# Altium PCB 光电读码.pcbdoc
Units mm, origin at the board's own origin, x right, y up, seen from the top; angles counter-clockwise.
Board outline 22.23 x 31 mm, 2 copper layers (Top Layer, Bottom Layer); 13 components, 154 nets, 41 pads, 11 vias.
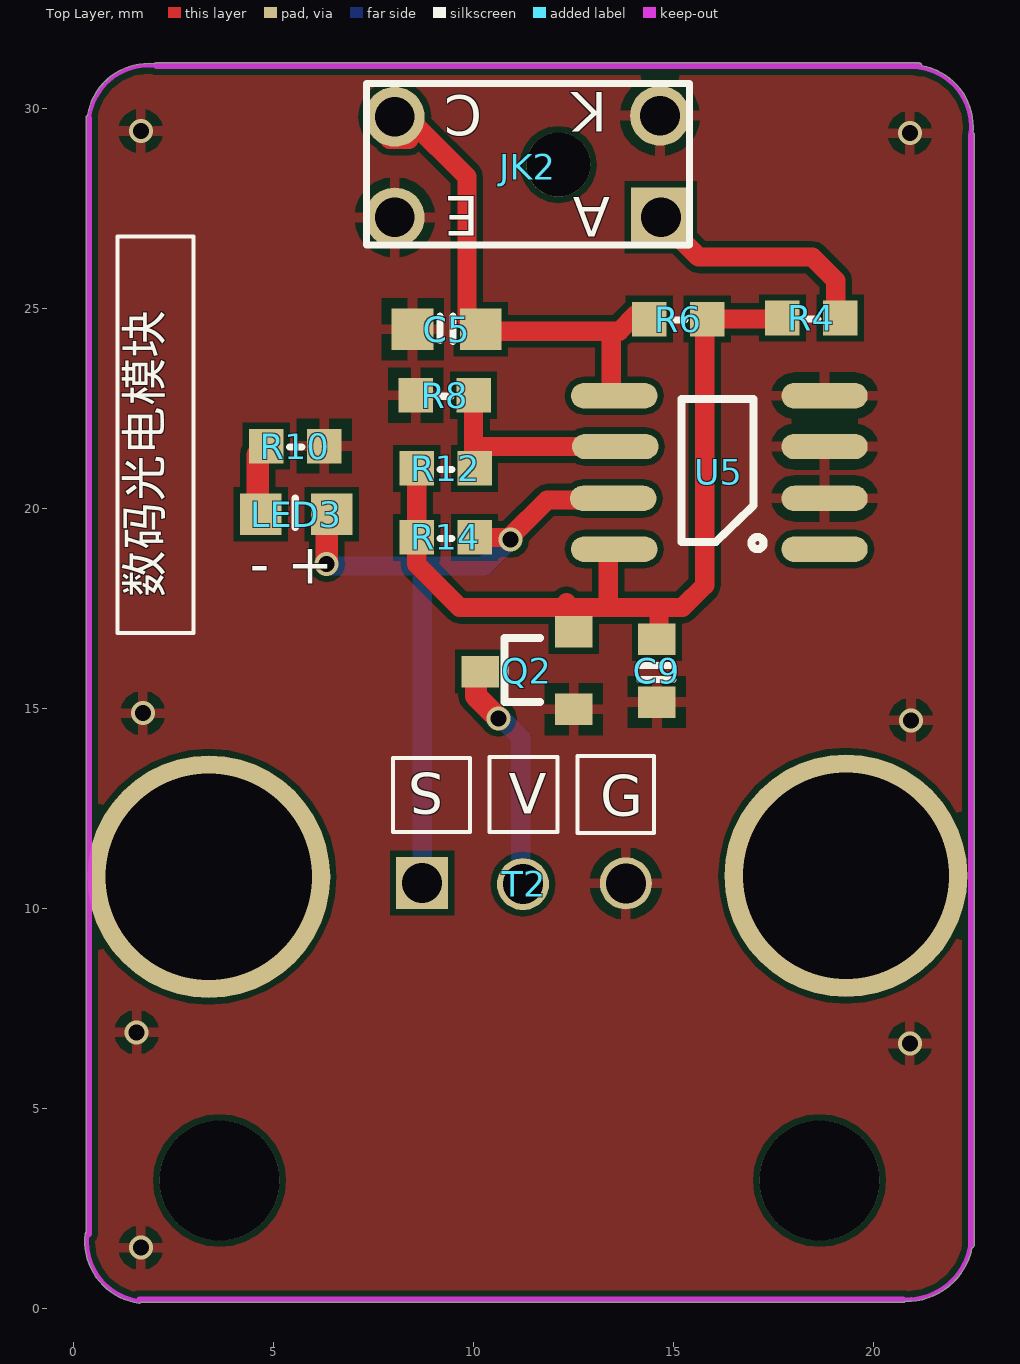
[diagram p0: Top Layer view]
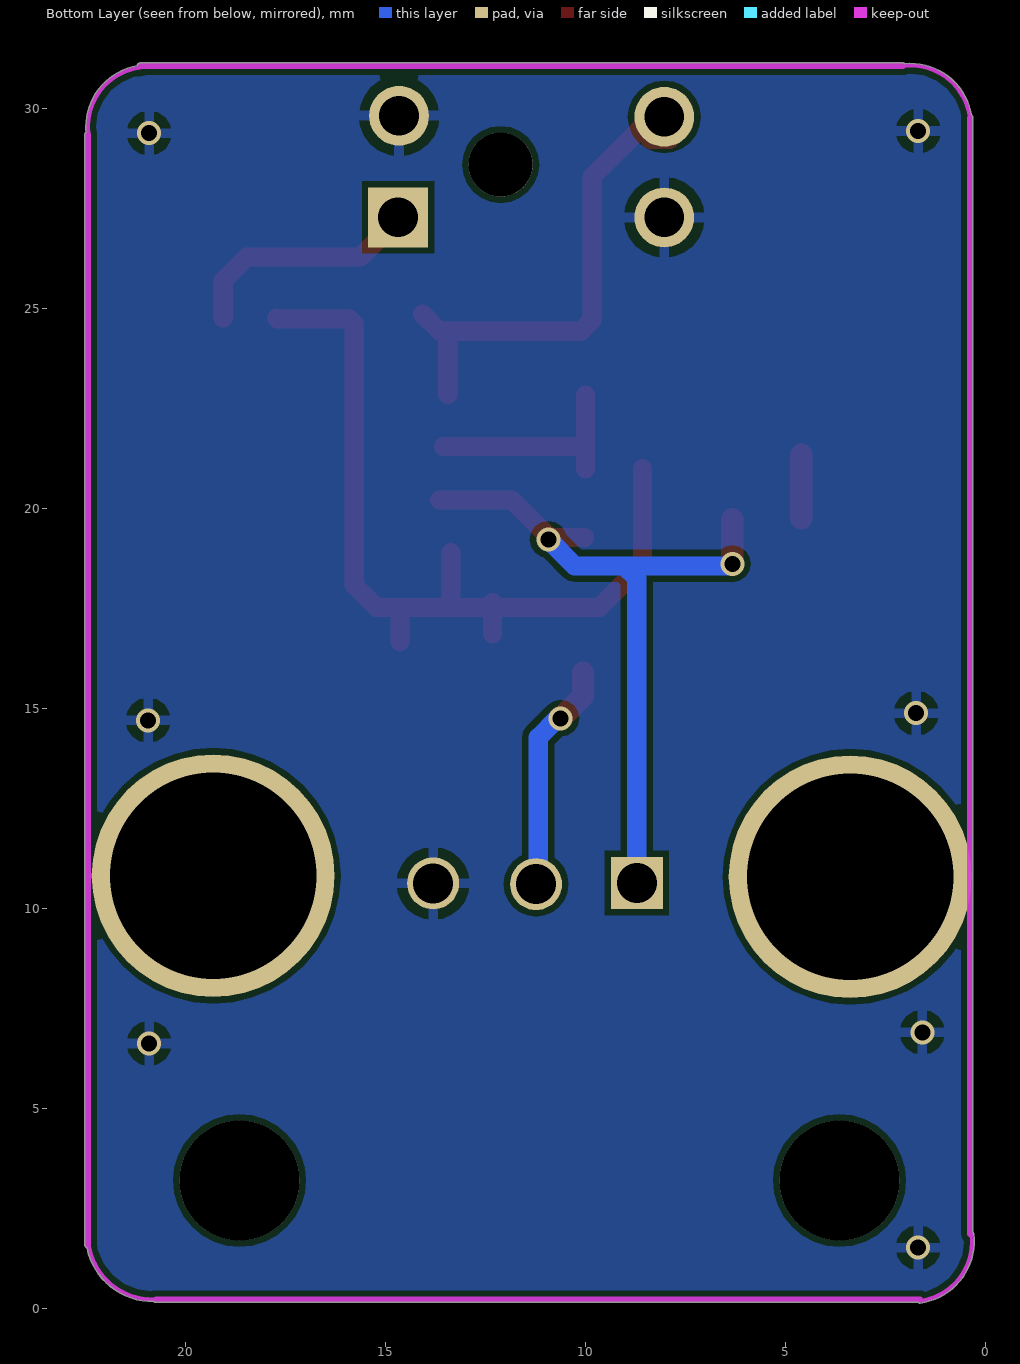
[diagram p1: Bottom Layer view, seen from below]

## Layer stack, top to bottom
Top Solder: solder mask 0.0102, Solder Resist, Dk 3.5
Top Layer: signal copper 0.0356
Dielectric 1: dielectric 0.32, FR-4, Dk 4.8
Bottom Layer: signal copper 0.0356
Bottom Solder: solder mask 0.0102, Solder Resist, Dk 3.5

## Board outline
0.291,1.882 ccw(c1.827,1.685) 1.63,0.148 ccw(c1.637,0.199) 1.675,0.165 20.731,0.165 ccw(c20.731,0.24) 20.784,0.187 ccw(c20.819,1.853) 22.454,1.527 ccw(c22.432,1.599) 22.508,1.599 22.508,29.361 ccw(c22.432,29.361) 22.477,29.421 ccw(c20.934,29.552) 22.483,29.552 ccw(c20.934,29.552) 21.2,31.078 ccw(c21.124,31.076) 21.124,31.151 2.062,31.151 ccw(c2.062,31.076) 2.012,31.132 ccw(c1.871,29.59) 0.343,29.842 ccw(c0.385,29.78) 0.31,29.78 0.31,1.915 ccw(c0.341,1.875)

## Design rules (kind name [scope] priority, off if disabled: settings)
Clearance [All] p1: gap=0.152 ignorepadtopadclearanceinfootprint=FALSE
HoleToHoleClearance [All] p1: gap=0.203 allowstackedmicrovias=TRUE
PolygonConnect [All] p1: connectstyle=Relief reliefconductorwidth=0.254 reliefentries=4 polygonreliefangle="90 Angle" airgapwidth=0.254
RoutingVias [All] p1: holewidth=6 width=8 viastyle="Through Hole" minholewidth=0.3 minwidth=0.6 maxholewidth=0.711 maxwidth=1.27
SilkToSilkClearance [All] p1: silktosilkclearance=0.152
SolderMaskExpansion [All] p1: expansion=0.102
Width [All] p1: maxlimit=5 minlimit=0.203 preferedwidth=0.254
28 further rules are at their usual default settings.

## Components (designator, comment, footprint, x,y, rotation, side; value= is the part's Value field where it differs from the comment)
C5 "104" COMPONENT_4 9.32,24.494 r180 top
C9 "105" COMPONENT_5 14.578,15.96 r0 top
JK2 "ITR20403红外线对射式光电开关" COMPONENT_1 11.352,28.558 r0 top
LED3 "LED蓝" COMPONENT_2 5.561,19.871 r0 top
Q2 "662K" COMPONENT_6 11.327,15.96 r0 top
R4 "100R" COMPONENT_3 18.439,24.773 r0 top
R6 "10K" COMPONENT_3 15.112,24.748 r0 top
R8 "10K" COMPONENT_3 9.27,22.843 r0 top
R10 "150R" COMPONENT_3 5.536,21.573 r0 top
R12 "10K" COMPONENT_3 9.295,21.014 r0 top
R14 "10K" COMPONENT_3 9.295,19.287 r0 top
T2 "弯针连接器KF2510-3P白色" 21 8.711,10.651 r270 top
U5 "LM358" COMPONENT_7 16.128,20.913 r0 top

## Footprints (in the part's own frame and the unit in brackets; to place one, negate y for a bottom-side part, rotate by r counter-clockwise, add the part's x,y. Pads: shape width x height; smd on the part's side, far side on the other; paste and mask are expansions set on the pad)
21 [mm]
  rect 1.3x1.3 hole 1: 1(0,0)
  round 1.3 hole 1: 2(0.031,2.519) 3(0.01,5.09)
COMPONENT_1 [mil]
  rect 58.84x58.84 hole 39: 1(131,-50)
  round 58.84 hole 39: 2(130,50) 3(-131,49) 4(-131,-50)
  round 63 hole 63: 5(30,2)
  silkscreen extent -159,-77 159,82
COMPONENT_2 [mil]
  rect 41x41 smd: 1(35,0) 2(-35,0)
  silkscreen extent -1,-13 -1,16
COMPONENT_3 [mil]
  rect 34x34 smd: 1(-28.5,0) 2(28.5,0)
  silkscreen extent -6,-1 6,-1
COMPONENT_4 [mil]
  rect 41x41 smd: 1(33.5,0) 2(-33.5,0)
  silkscreen extent -6,-13 7,12
COMPONENT_5 [mil]
  rect 37x31 smd: 1(0,31) 2(0,-31)
  silkscreen extent -18,-9 16,5
COMPONENT_6 [mil]
  rect 37x31 smd: 1(46,-38) 2(46,38) 3(-46,-1)
  silkscreen extent -22,-31 13,32
COMPONENT_7 [mil]
  oval 85x25 smd: 1(104,-75.5) 2(104,-25.5) 3(104,25.5) 4(104,75.5) 5(-103,75.5) 6(-102,25.5) 7(-104,-25.5) 8(-103,-75.5)
  silkscreen extent -37,-75 44,72

## Free pads (board coordinates)
  round 6.071 hole 5.156: 1(19.303,10.829) 2(3.377,10.803)
  round 3 hole 3 mask+0.102: 13(3.643,3.212) 14(18.643,3.212)

## Via types
v1: diameter 0.6, hole 0.4, Top Layer to Bottom Layer, tented both sides, 10 vias
v2: diameter 0.8, hole 0.4, Top Layer to Bottom Layer, 1 vias

## Nets (pads, with @x,y where several pads share a name; then routed paths per layer and width w, separated by ;. In a path a pad name is that pad's centre, name@x,y a point inside that pad or via, vN(x,y) a via of type N, cw(c..) or ccw(c..) an arc to the next point about the centre after c; other vN are vias at no path point)
3.3V: 
+5v: 
AOUT1: 
AOUT2: 
BOUT1: 
BOUT2: 
D+: 
D-: 
DTR: 
GND: C5.1 C9.2 JK2.2 JK2.4 Q2.1 R8.1 R10.2 T2.3 U5.2 U5.3 U5.4
  other v1: 1.675,1.532 20.903,6.638 1.573,6.917 20.928,14.715 1.726,14.893 20.903,29.396 1.675,29.447
M11: 
M12: 
M21: 
M22: 
Net: 
NewNet1: 
NewNet2: 
NewNet3: 
NewNet4: 
NewNet15: 
NewNet16: 
NewNet17: 
NewNet18: 
NewNet19: 
NewNet20: 
NewNet21: 
NewNet22: 
NewNet23: 
NewNet24: 
NewNet25: 
NewNet26: 
NewNet27: 
NewNet28: 
NewNet29: 
NewNet30: 
NewNet31: 
NewNet32: 
NewNet33: 
NewNet34: 
NewNet35: 
NewNet36: 
NewNet37: 
NewNet38: 
NewNet39: 
NewNet40: 
NewNet41: 
NewNet42: 
NewNet43: 
NewNet44: 
NewNet45: 
NewNet46: 
NewNet47: 
NewNet48: 
NewNet49: 
NewNet50: 
NewNet51: 
NewNet52: 
NewNet53: 
NewNet55: C5.2 JK2.3 R6.1 U5.5 | length 12
  Top Layer w0.481: JK2.3@7.898,29.244 JK2.3@8.381,29.244 ; JK2.3@8.381,29.752 9.828,28.304 9.828,24.723 10.108,24.443 13.638,24.443 R6.1@14.07,24.875 ; U5.5@13.435,22.868 13.435,24.265
NewNet56: JK2.1 R4.2 | length 6
  Top Layer w0.481: JK2.1 14.68,27.237 15.62,26.297 18.464,26.297 19.049,25.713 R4.2@19.049,24.773
NewNet57: Q2.3 T2.2 | length 5.7
  Top Layer w0.557: Q2.3@10.057,15.909 10.057,15.325 v1(10.616,14.766)
  Bottom Layer w0.481: v1@10.692,14.766 11.175,14.283 T2.2@11.175,10.674
NewNet58: LED3.1 R14.2 T2.1 U5.7 | length 18.1
  Top Layer w0.481: R14.2 10.895,19.287 11.835,20.227 U5.7@13.638,20.227
  Top Layer w0.557: v1(6.323,18.627) LED3.1@6.323,19.744
  Bottom Layer w0.481: v1(6.323,18.627) 6.374,18.576 9.016,18.576 ; T2.1 8.711,18.271 9.016,18.576 ; v1(10.921,19.236) 10.26,18.576 9.016,18.576
NewNet59: 
NewNet60: 
NewNet61: 
NewNet62: 
NewNet63: 
NewNet64: 
NewNet65: 
NewNet66: 
NewNet67: 
NewNet68: 
NewNet69: 
NewNet70: 
NewNet71: 
NewNet72: 
NewNet73: 
NewNet74: 
NewNet75: 
NewNet76: 
NewNet77: 
NewNet78: 
NewNet79: 
NewNet80: 
NewNet81: 
NewNet82: 
NewNet83: 
NewNet84: 
NewNet85: 
NewNet86: 
NewNet87: 
NewNet88: 
NewNet89: 
NewNet90: 
NewNet91: 
NewNet92: 
NewNet93: 
NewNet94: 
NewNet95: 
NewNet96: 
NewNet97: 
NewNet100: 
NewNet102: 
NewNet104: 
NewNet105: 
NewNet107: 
NewNet112: 
NewNet113: 
NewNet115: 
NewNet116: 
NewNet117: 
NewNet118: 
NewNet119: 
NewNet120: 
NewNet121: 
NewNet122: 
NewNet123: 
NewNet124: 
NewNet125: 
NewNet126: C9.1 Q2.2 R4.1 R6.2 R12.1 R14.1 U5.8 | length 21.5
  Top Layer w0.481: R12.1 8.571,18.614 9.651,17.534 15.213,17.534 15.772,18.093 15.772,24.621 15.899,24.748 17.69,24.748 R4.1 ; Q2.2@12.318,16.874 12.318,17.661 ; 13.359,17.661 U5.8@13.359,18.906 ; C9.1@14.629,16.671 14.629,17.357
NewNet127: R8.2 R12.2 U5.6 | length 5.2
  Top Layer w0.481: R12.2@9.993,21.002 R8.2 ; 10.222,21.56 U5.6
NewNet128: LED3.2 R10.1 | length 1.6
  Top Layer w0.557: LED3.2@4.596,19.77 R10.1@4.596,21.357
NewNet129: 
NewNet130: 
NewNet131: 
NewNet132: 
NewNet133: 
NewNet134: 
NewNet135: 
NewNet136: 
NewNet137: 
NewNet138: 
NewNet139: 
NewNet140: 
NewNet141: 
NewNet142: 
NewNet143: 
NewNet144: 
NewNet145: 
NewNet146: 
NewNet147: 
NewNet148: 
NewNet149: 
NewNet150: 
NewNet151: 
R1: 
R2: 
RTS: 
RXD: 
TXD: 
V3: 
VBUS: 
VIN: 
VM: 
pads on no net: JK2.5 U5.1
copper on no net:
  other v2: 135.616,58.069

## Polygon pours and split planes (outlines as drawn)
GND on Top Layer "Top Layer-No Net" (solid, pour order 11): 0.291,1.882 ccw(c1.827,1.685) 1.63,0.148 ccw(c1.637,0.199) 1.675,0.165 20.731,0.165 ccw(c20.731,0.24) 20.784,0.187 ccw(c20.819,1.853) 22.454,1.527 ccw(c22.432,1.599) 22.508,1.599 22.508,29.361 ccw(c22.432,29.361) 22.477,29.421 ccw(c20.934,29.552) 22.483,29.552 ccw(c20.934,29.552) 21.2,31.078 ccw(c21.124,31.076) 21.124,31.151 2.062,31.151 ccw(c2.062,31.076) 2.012,31.132 ccw(c1.871,29.59) 0.343,29.842 ccw(c0.385,29.78) 0.31,29.78 0.31,1.915 ccw(c0.341,1.875)
GND on Bottom Layer "Top Layer-No Net1" (solid, pour order 12): 0.291,1.882 ccw(c1.827,1.685) 1.63,0.148 ccw(c1.637,0.199) 1.675,0.165 20.731,0.165 ccw(c20.731,0.24) 20.784,0.187 ccw(c20.819,1.853) 22.454,1.527 ccw(c22.432,1.599) 22.508,1.599 22.508,29.361 ccw(c22.432,29.361) 22.477,29.421 ccw(c20.934,29.552) 22.483,29.552 ccw(c20.934,29.552) 21.2,31.078 ccw(c21.124,31.076) 21.124,31.151 2.062,31.151 ccw(c2.062,31.076) 2.012,31.132 ccw(c1.871,29.59) 0.343,29.842 ccw(c0.385,29.78) 0.31,29.78 0.31,1.915 ccw(c0.341,1.875)

## Keep-outs
Keep-Out Layer:
  lines w0.102: 0.341,1.875 ccw(c1.827,1.685) 1.637,0.199 ; 0.385,29.78 cw(c1.871,29.59) 2.062,31.076 ; 20.731,0.24 ccw(c20.819,1.853) 22.432,1.764 ; 21.124,31.037 cw(c20.934,29.552) 22.42,29.361
  lines w0.15: 0.385,1.875 0.385,29.78 ; 1.637,0.24 20.731,0.24 ; 2.062,31.076 21.124,31.076 ; 22.432,1.599 22.432,29.361

## Silkscreen, mask and mechanical layers (free items; w line width, h text height)
Top Overlay:
  lines w0.1: 1.116,26.805 2.996,26.805 2.996,16.899 1.091,16.899 1.091,26.805 1.446,26.805 ; 10.387,13.775 10.387,11.921 12.089,11.921 12.089,13.801 10.387,13.801 ; 7.974,11.921 7.974,13.775 9.905,13.775 9.905,11.921 7.974,11.921 ; 12.597,11.896 12.597,13.826 14.502,13.826 14.502,11.896 12.597,11.896
  text "- +" at 4.394,18.136 h1
  text "数码光电模块" at 2.457,17.763 h1.5 r90
  text "S" at 9.244,13.394 h1.02 r180
  text "V" at 10.87,12.378 h1.02
  text "G" at 13.156,12.327 h1.02

## Text inside footprints (layer, text, board x,y; h text height)
JK2: Top Overlay "E" at 10.133,27.821 h0.99 r180; Top Overlay "C" at 10.209,30.336 h0.99 r180; Top Overlay "K" at 13.334,30.412 h0.99 r180; Top Overlay "A" at 13.41,27.796 h0.99 r180